# EAGLE board outline (EAGLE 6.3)
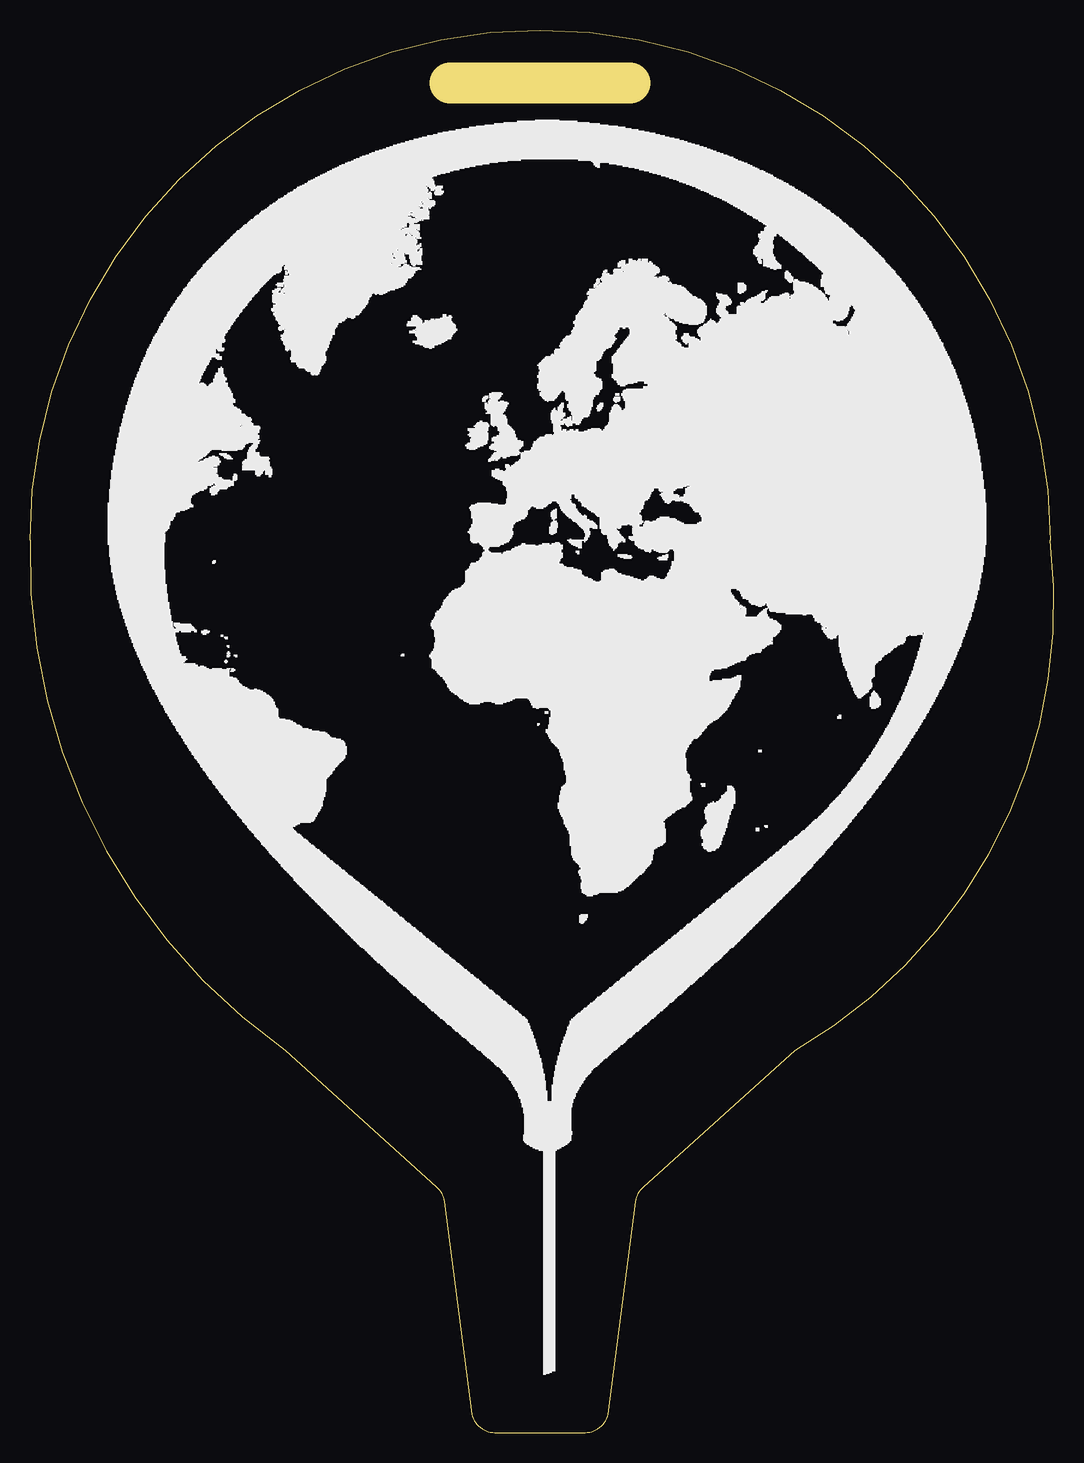
[diagram p0: board, top side]
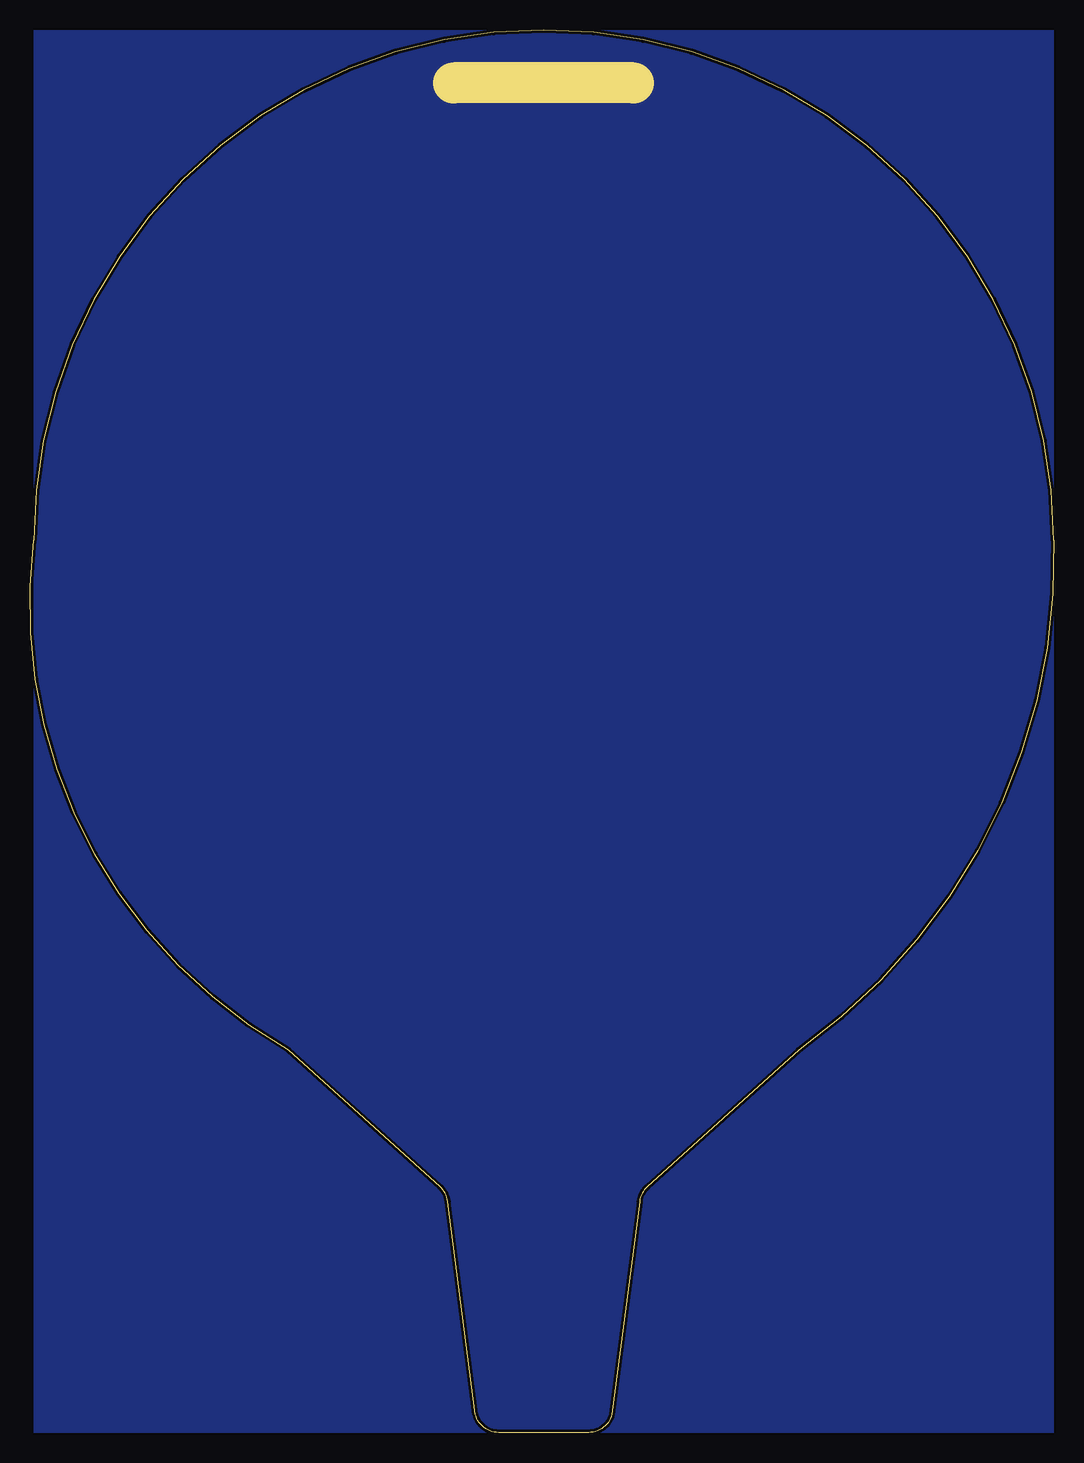
[diagram p1: board, bottom side, seen from below]

Size 85.31 x 116.88 mm. Coordinates in mm from the lower left corner, seen from the top.
Outline: 0,74.38 arc-180 85,74.38 arc-67 63.75,31.88 51.13,20.48 arc41 50.49,19.25 48.19,1.52 arc-76 46.25,0 38.75,0 arc-76 36.81,1.52 34.51,19.25 arc41 33.87,20.48 21.25,31.88
Outline: 0,74.38 arc56 21.25,31.88
Outline: 0,74.38 arc56 21.25,31.88
Copper layers (1*16): Top 0.035mm / dielectric 1.5mm / Bottom 0.035mm
Design rules "Hackvana": minimum track width 6mil, minimum drill 0.29mm, track to track 6mil, track to pad 6mil, pad to pad 6mil, via to via 6mil, smd to smd 0mil, copper to edge 10mil, drill to drill 10mil, minimum pad ring 10mil, minimum via ring 6mil, stop-mask expansion 2mil, vias tented up to drill 100mil, thermal gap 10mil
Milling: 1 lines

## Placement (x,y rotation side)
U$1  [UKHASBALLOON0.1]  -5.76,-0.56 0 top  (outside the outline)

## Library data of the parts
U$1 = Logos

## Tracks (layer width: path | path; a pad name or v marks a point on that pad's centre or on a via)
GND
  pour Bottom: 0,116.88 0,0 85,0 85,116.88